# EAGLE board ethernet-dlt (EAGLE 9.4.2)
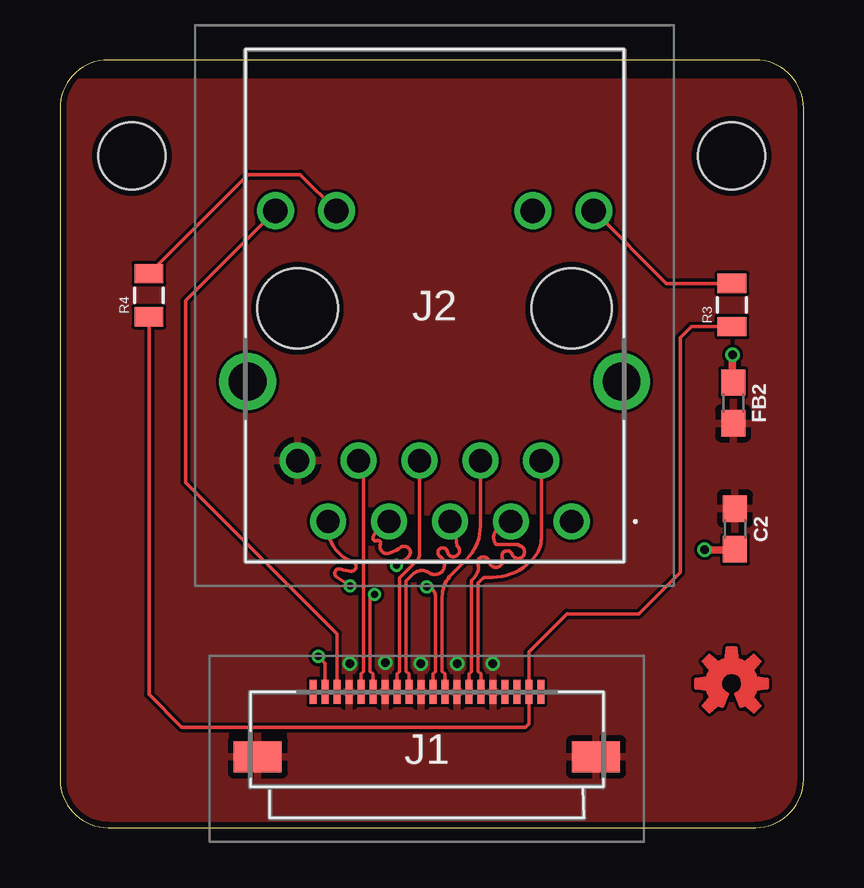
[diagram p0: board, top side]
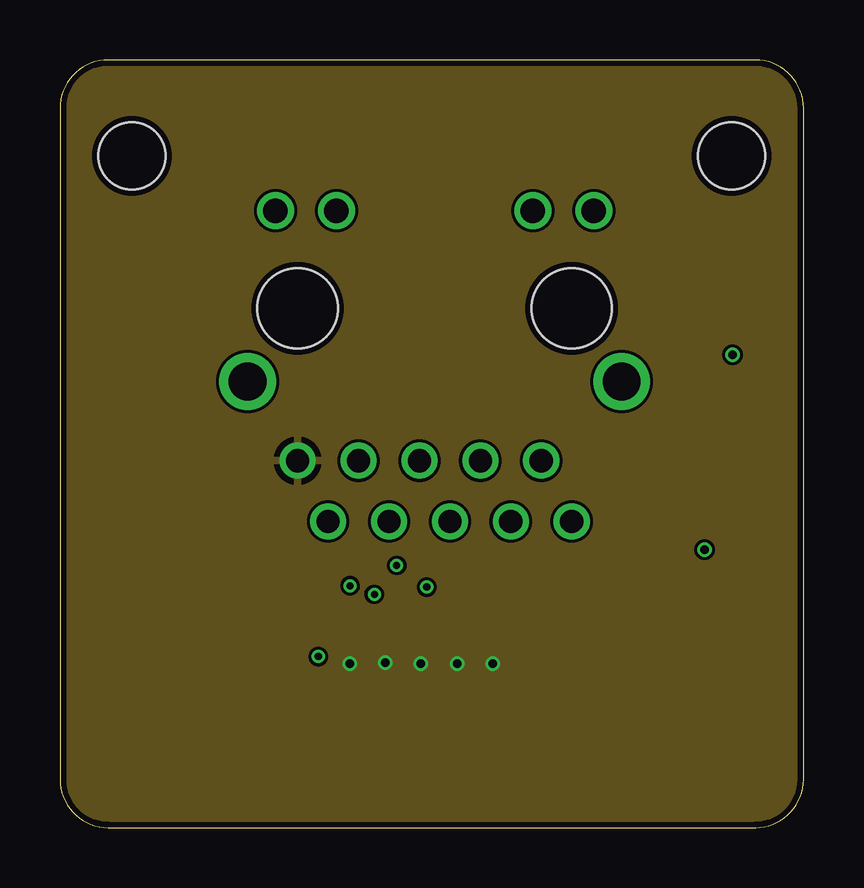
[diagram p1: board, inner layer Route2]
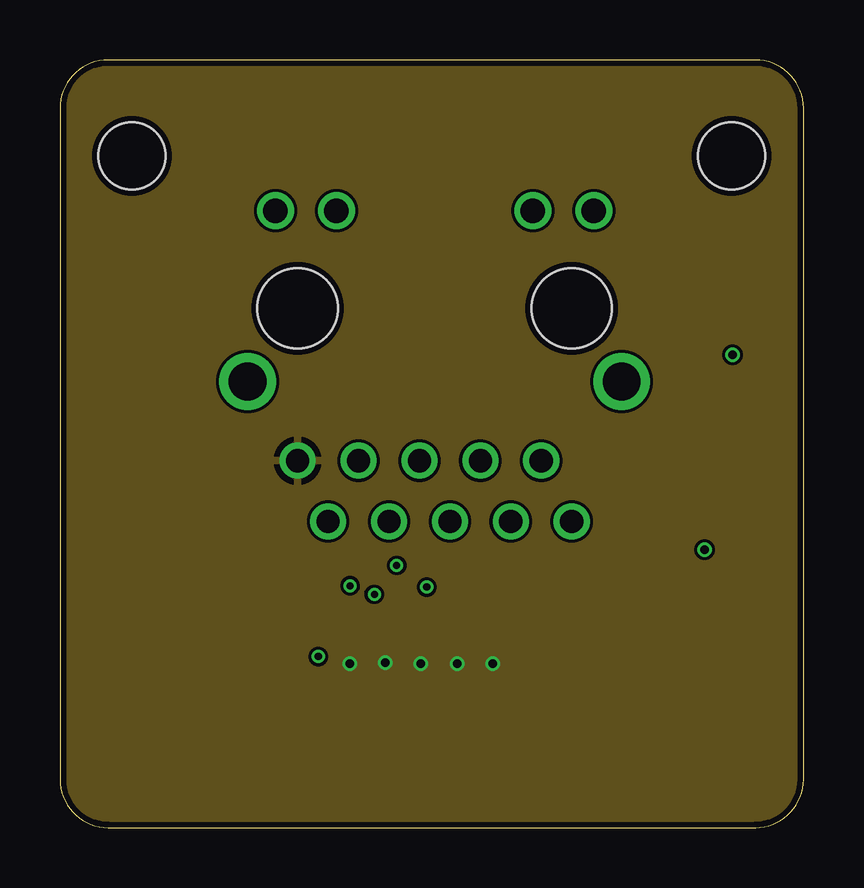
[diagram p2: board, inner layer Route15]
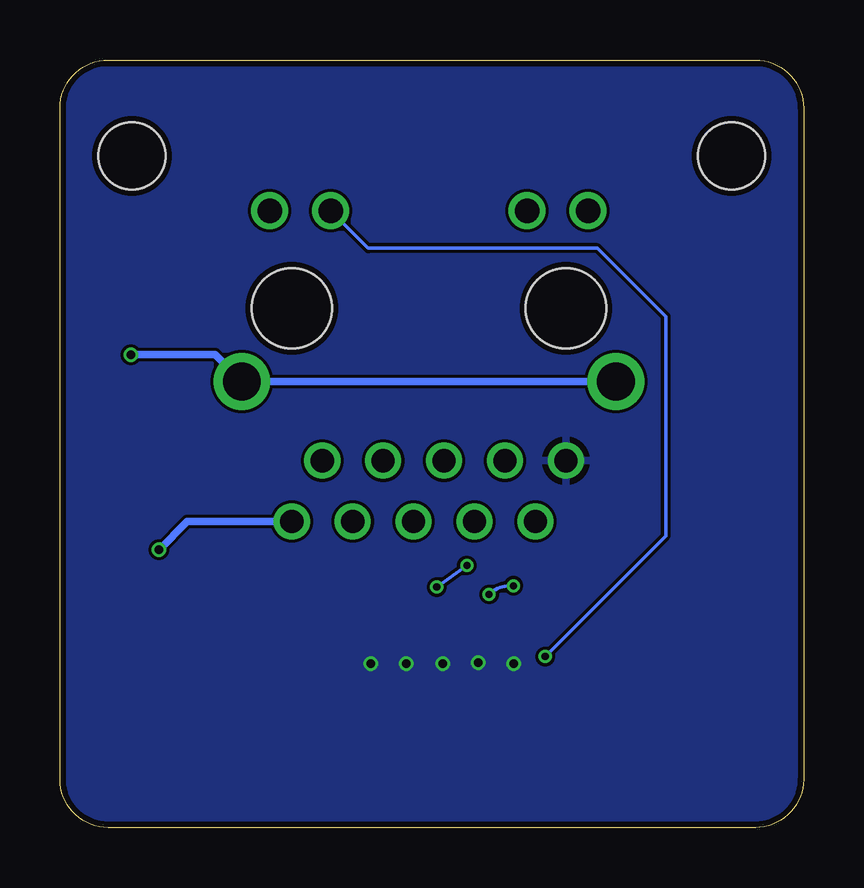
[diagram p3: board, bottom side, seen from below]

Size 31 x 32 mm. Coordinates in mm from the lower left corner, seen from the top.
Outline: 0,30 0,2 arc90 2,0 29,0 arc90 31,2 31,30 arc90 29,32 2,32 arc90 0,30
Copper layers (1+2*15+16): Top 0.035mm / dielectric 0.2mm / Route2 0.0175mm / dielectric 0.265mm / Route15 0.0175mm / dielectric 0.2mm / Bottom 0.035mm
Design rules "DLT-4Layer": minimum track width 6mil, minimum drill 0.2mm, track to track 5mil, track to pad 4mil, pad to pad 4mil, via to via 4mil, smd to smd 0mil, copper to edge 10mil, drill to drill 10mil, minimum pad ring 10mil, minimum via ring 0.125mm, stop-mask expansion 2mil, vias tented up to drill 100mil, thermal gap 10mil
Holes 2.8 mm at 3,28 28,28

## Footprints (pad centres in the part's own frame; a part is rotated, then mirrored left to right if it is on the bottom)
0603 = smd 1.1 x 1: 1 -0.85,0; 2 0.85,0
5051102091 = smd 0.3 x 1: 1 -4.75,2.625; 2 -4.25,2.625; 3 -3.75,2.625; 4 -3.25,2.625; 5 -2.75,2.625; 6 -2.25,2.625; 7 -1.75,2.625; 8 -1.25,2.625; 9 -0.75,2.625; 10 -0.25,2.625; 11 0.25,2.625; 12 0.75,2.625; 13 1.25,2.625; 14 1.75,2.625; 15 2.25,2.625; 16 2.75,2.625; 17 3.25,2.625; 18 3.75,2.625; 19 4.25,2.625; 20 4.75,2.625 | smd 2 x 1.3: MP1 -7.05,-0.075; MP2 7.05,-0.075
936263508 = drill 0.97 pad 1.509: 1 0,0; 2 1.27,-2.54; 3 2.54,0; 4 3.81,-2.54; 5 5.08,0; 6 6.35,-2.54; 7 7.62,0; 8 8.89,-2.54; 9 10.16,0; 10 11.43,-2.54 | drill 1.02 pad 1.53: 11 -0.92,-12.96; 12 1.62,-12.96; 13 9.81,-12.96; 14 12.35,-12.96 | drill 1.58 pad 2.37: MH1 -2.08,-5.84; MH2 13.51,-5.84 | hole 3.34: 0,-8.89; 11.43,-8.89
0805 = smd 0.8 x 1.2: 1 -0.9,0; 2 0.9,0

## Placement (x,y rotation side)
C2  10nF  [0603]  28.14,12.45 270 top
FB2  .25/3A  [0603]  28.07,17.7 270 top
J1  505110-2091  [5051102091]  15.3,3.02 0 top
J2  93626-3508  [936263508]  21.34,12.76 180 top
LOGO1  OSHW-LOGOS-COPPER  [OSHW-LOGO-S_COPPER]  28,6 0 top
R3  220  [0805]  28.02,21.78 90 top
R4  220  [0805]  3.71,22.19 90 top

## Library data of the parts
C2 = SparkFun-Capacitors; PROD_ID: CAP-00867
FB2 = SparkFun-Coils; PROD_ID: NDUC-13805
J1 = SamacSys_Parts; DESCRIPTION: MOLEX - 505110-2091 - CONNECTOR, FFC/FPC, 20POS, 1ROW, 0.5MM; HEIGHT: 2.1mm; MANUFACTURER_NAME: Molex; MANUFACTURER_PART_NUMBER: 505110-2091; MOUSER_PART_NUMBER: 538-505110-2091; MOUSER_PRICE-STOCK: https://www.mouser.com/Search/Refine.aspx?Keyword=538-505110-2091
J2 = SamacSys_Parts; DESCRIPTION: MOLEX - 93626-3508 - RJ45 CONNECTOR, JACK, 8P8C, 1PORT, TH; HEIGHT: 15.4mm; MANUFACTURER_NAME: Molex; MANUFACTURER_PART_NUMBER: 93626-3508; MOUSER_PART_NUMBER: 538-93626-3508; MOUSER_PRICE-STOCK: https://www.mouser.com/Search/Refine.aspx?Keyword=538-93626-3508
LOGO1 = SparkFun-Aesthetics
R3 R4 = SparkFun-Passives

## Nets
3.3V: J1.19 R3.1 R4.1
5V: J1.20
ENET_LED0: J1.3 J2.14
ENET_LED1: J1.2 J2.12
ENET_TRD0_N: J1.14 J2.3
ENET_TRD0_P: J1.15 J2.2
ENET_TRD1_N: J1.11 J2.7
ENET_TRD1_P: J1.12 J2.4
ENET_TRD2_N: J1.8 J2.6
ENET_TRD2_P: J1.9 J2.5
ENET_TRD3_N: J1.6 J2.9
ENET_TRD3_P: J1.5 J2.8
GND: C2.1 FB2.2 J1.4 J1.7 J1.10 J1.13 J1.16 J1.MP1 J1.MP2 J2.10
N$5: J2.11 R3.2
N$6: J2.13 R4.2
N$7: C2.2 J2.1
N$8: FB2.1 J2.MH1 J2.MH2

## Tracks (layer width: path | path; a pad name or v marks a point on that pad's centre or on a via)
3.3V
  Top 0.152: R3.1 26.32,20.88 25.86,20.42 25.86,10.64 24.13,8.91 21.13,8.91 19.55,7.32 J1.19 19.55,4.33 19.41,4.18 5.08,4.18 3.71,5.56 R4.1
ENET_LED0
  Top 0.152: J1.3 11.55,8.08 5.23,14.39 5.23,21.96 J2.14
ENET_LED1  (via drill 0.3)
  Top 0.152: J1.2 11.05,6.85 v10.77,7.13
  Bottom 0.152: v10.77,7.13 5.74,12.16 5.74,21.3 8.59,24.15 18.15,24.15 J2.12
ENET_TRD0_N
  Top 0.152: J1.14 17.05,6.4 17.16,6.51 17.16,10.31 17.28,10.43 arc61 17.42,10.99 arc-187 17.88,11.09 arc192 18.44,11.25 arc-181 18.85,11.4 arc239 19.15,11.75 arc45 19.03,11.8 18.29,11.8 arc-85 18.16,11.84 arc-95 18.32,12.5 J2.3
ENET_TRD0_P
  Top 0.152: J1.15 17.55,6.4 17.44,6.51 17.44,10.19 17.48,10.23 17.68,10.43 18.03,10.43 arc45 19.59,11.08 19.71,11.2 arc45 20.07,12.05 J2.2
ENET_TRD1_N  (via drill 0.3)
  Top 0.152: J1.11 15.55,6.4 15.66,6.51 15.66,9.62 arc84 v15.29,10.03 | v14.04,10.93 14.5,11.26 arc180 14.2,11.67 arc-22 13.68,11.43 arc-125 13.36,11.8 arc133 13.21,11.96 arc-133 13.06,12.11 arc-49 J2.7
  Bottom 0.152: v15.29,10.03 v14.04,10.93
ENET_TRD1_P
  Top 0.152: J1.12 16.05,6.4 15.94,6.51 15.94,9.62 arc-45 16.32,10.55 16.97,11.2 arc45 17.53,12.54 J2.4 arc-45 J2.4
ENET_TRD2_N
  Top 0.152: J1.8 14.05,6.4 14.16,6.51 14.16,10.4 14.89,11.14 arc45 14.99,11.37 J2.6
ENET_TRD2_P
  Top 0.152: J1.9 14.55,6.4 14.44,6.51 14.44,10.29 14.7,10.55 arc-80 15.4,10.62 arc182 15.85,11.3 arc-227 16.15,11.5 arc222 16.56,11.74 16.44,12.62 16.31,12.76 arc-88 J2.5
ENET_TRD3_N  (via drill 0.3)
  Top 0.152: J1.6 13.05,6.4 12.94,6.51 12.94,9.72 v13.11,9.72 | v12.09,10.08 11.54,10.45 arc-166 11.7,10.78 arc16 12.14,10.69 arc164 12.22,11.07 arc-78 J2.9
  Bottom 0.152: v13.11,9.72 arc45 12.25,10.08 v12.09,10.08
ENET_TRD3_P
  Top 0.152: J1.5 12.55,6.4 12.66,6.51 12.66,14.79 arc45 J2.8
GND  (via drill 0.35)
  other vias: 12.09,6.83 13.56,6.88 15.04,6.83 16.56,6.83 18.03,6.83
  pour Top: -1.17,31.07 32.26,31.07 32.26,-0.71 -1.17,-0.71
  pour Bottom: -1.68,31.58 -1.68,-1.52 33.07,-1.52 33.07,31.58
  pour Route15: -2.03,31.93 -2.03,-2.49 33.63,-2.49 33.63,31.93
  pour Route2: -2.39,32.29 -2.39,-3.86 34.39,-3.86 34.39,32.29
N$5
  Top 0.152: R3.2 25.29,22.68 J2.11
N$6
  Top 0.152: R4.2 7.85,27.23 10.02,27.23 J2.13
N$7  (via drill 0.35)
  Top 0.305: v26.87,11.58 28.13,11.58 C2.2
  Bottom 0.305: J2.1 25.7,12.76 v26.87,11.58
N$8  (via drill 0.35)
  Top 0.305: v28.04,19.71 28.04,18.58 FB2.1
  Bottom 0.305: J2.MH2 J2.MH1 24.53,19.71 v28.04,19.71

## Text on the board
tStop: Ethernet